# EAGLE board ECE445-Receiver-Schematic (EAGLE 7.5.0)
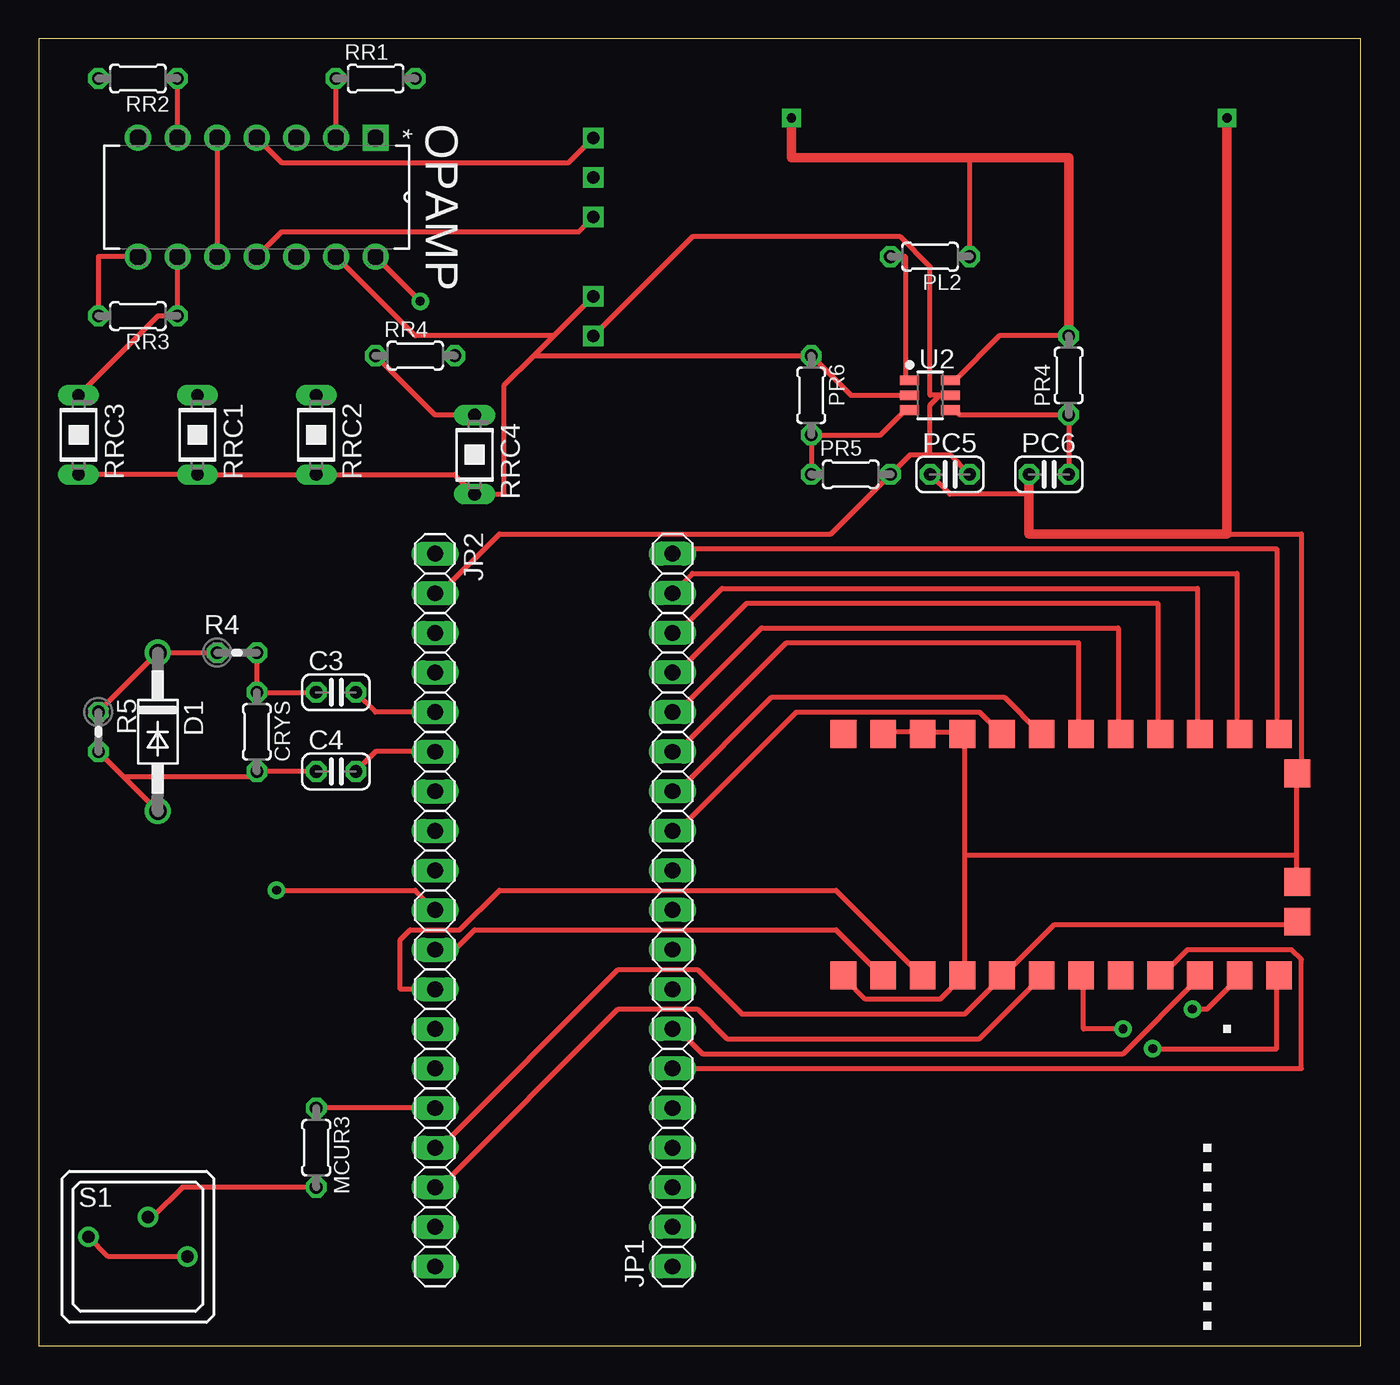
[diagram p0: board, top side]
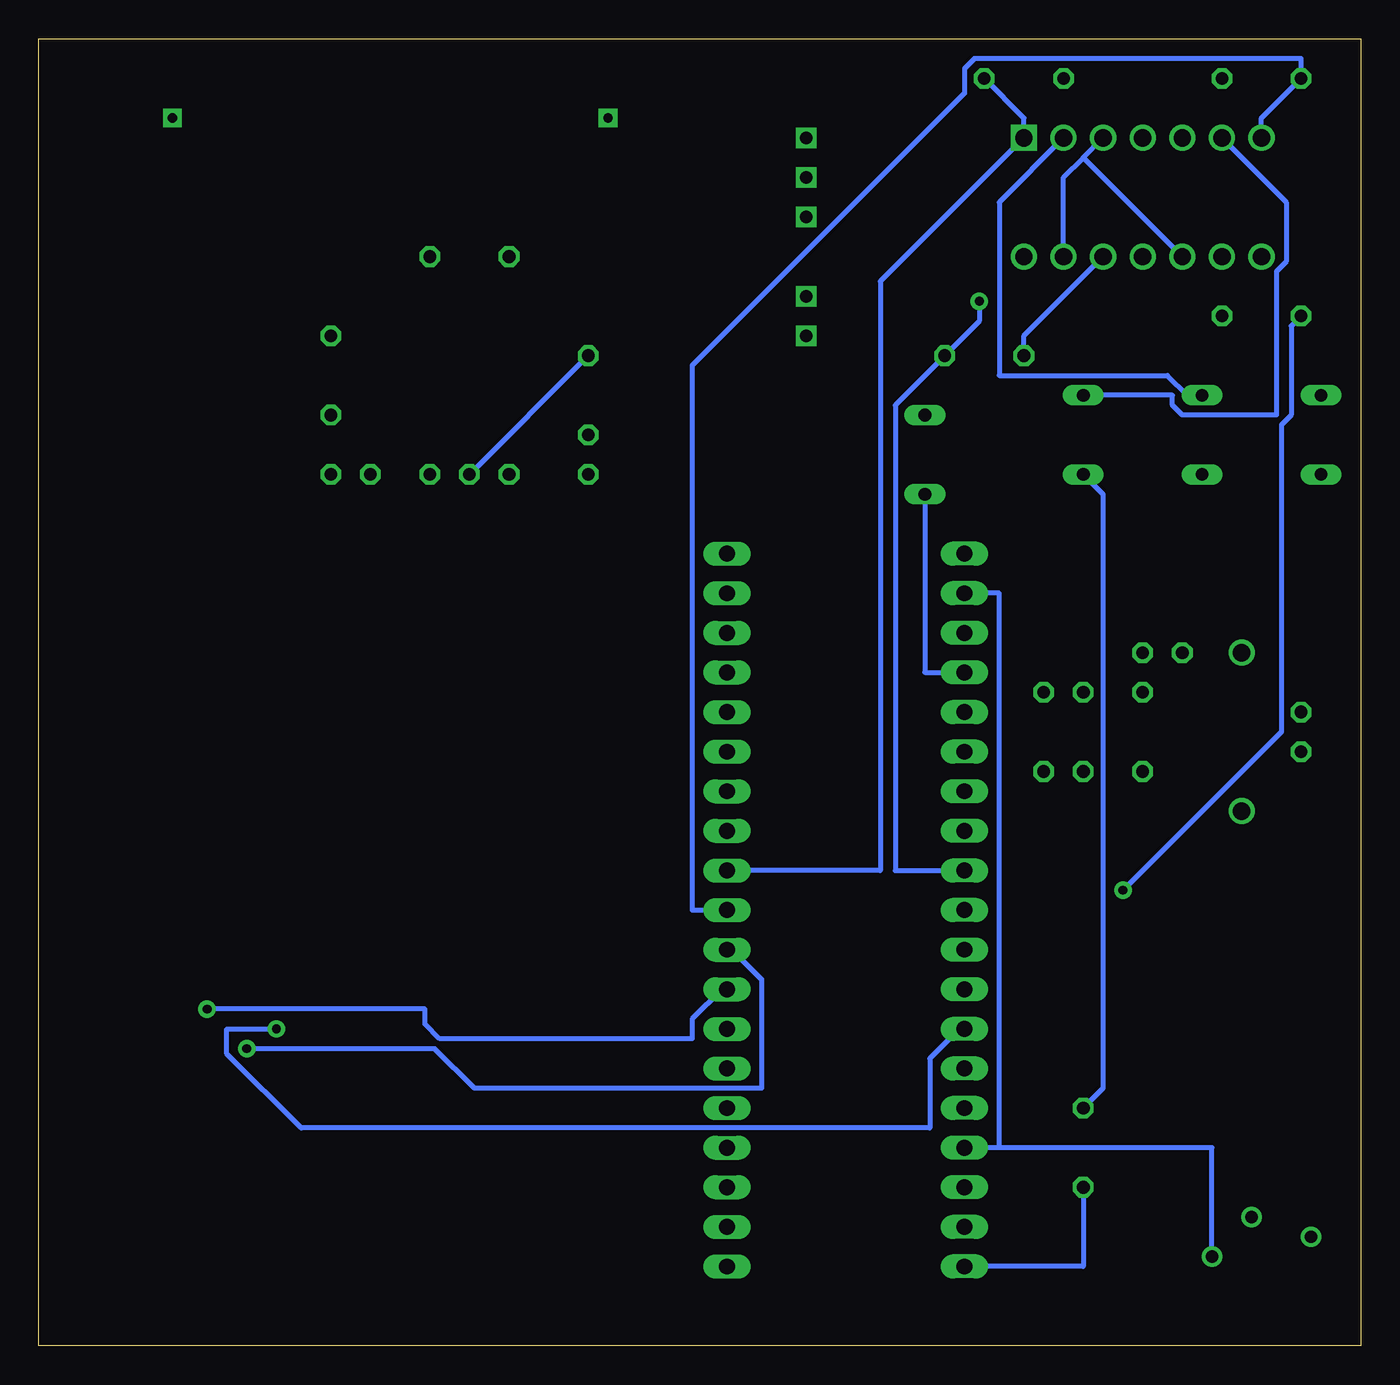
[diagram p1: board, bottom side, seen from below]

Size 84.76 x 83.81 mm. Coordinates in mm from the lower left corner, seen from the top.
Outline: 0,0 84.76,0 84.76,83.81 0,83.81 0,0
Copper layers (1*16): Top 0.035mm / dielectric 1.5mm / Bottom 0.035mm
Design rules "MWSEagleDesignRules2": minimum track width 13mil, minimum drill 22mil, track to track 13mil, track to pad 13mil, pad to pad 13mil, via to via 13mil, smd to smd 8mil, copper to edge 40mil, drill to drill 8mil, minimum pad ring 10mil, minimum via ring 8mil, stop-mask expansion 4mil, vias tented up to drill 0mil, thermal gap 10mil
vRestrict: area 3.8,69.8 to 24.1,77.5; area 54.6,58.4 to 59.7,63.5; area 50.2,22.2 to 83.2,41.3; area 24.1,3.8 to 41.9,53.3

## Footprints (pad centres in the part's own frame; a part is rotated, then mirrored left to right if it is on the bottom)
C025-024X044 = drill 0.813 octagon: 1 -1.27,0; 2 1.27,0
0204/5 = drill 0.813 octagon: 1 -2.54,0; 2 2.54,0
DO41-10 = drill 1.118: A 5.08,0; C -5.08,0
1X19 = drill 1.016 long: 1 -22.86,0; 2 -20.32,0; 3 -17.78,0; 4 -15.24,0; 5 -12.7,0; 6 -10.16,0; 7 -7.62,0; 8 -5.08,0; 9 -2.54,0; 10 0,0; 11 2.54,0; 12 5.08,0; 13 7.62,0; 14 10.16,0; 15 12.7,0; 16 15.24,0; 17 17.78,0; 18 20.32,0; 19 22.86,0
DIP254P762X469-14 = drill 1.118 square: 1 -7.62,15.24 | drill 1.118: 2 -7.62,12.7; 3 -7.62,10.16; 4 -7.62,7.62; 5 -7.62,5.08; 6 -7.62,2.54; 7 -7.62,0; 8 0,0; 9 0,2.54; 10 0,5.08; 11 0,7.62; 12 0,10.16; 13 0,12.7; 14 0,15.24
0204V = drill 0.813 octagon: 1 -1.27,0; 2 1.27,0
BPW32 = drill 0.813 long: A 0,2.54; K 0,-2.54
RDT1034 = drill 0.8: A 3.175,-0.635; A1 -3.175,0.635; B 0.65,1.9
TSOT-23-6 = smd 1.22 x 0.62: 1 -1.31,0.95; 2 -1.31,0; 3 -1.31,-0.95; 4 1.31,-0.95; 5 1.31,0; 6 1.31,0.95
LINX-KH3-TRANSMITTER = smd 1.78 x 1.65: 1 -8,14.44; 2 -8,11.9; 3 -8,9.36; 4 -8,6.82; 5 -8,4.28; 6 -8,1.74; 7 -8,-0.8; 8 -8,-3.34; 9 -8,-5.88; 10 -8,-8.42; 11 -8,-10.96; 12 -8,-13.5; 13 -4.55,-14.67; 14 -2.01,-14.67; 15 4.95,-14.67; 16 7.49,-13.5; 17 7.49,-10.96; 18 7.49,-8.42; 19 7.49,-5.88; 20 7.49,-3.34; 21 7.49,-0.8; 22 7.49,1.74; 23 7.49,4.28; 24 7.49,6.82; 25 7.49,9.36; 26 7.49,11.9; 27 7.49,14.44
NO_CONNECT = smd 0.305 x 0.152: P$1 0,0
PDM1-S3-D12-S = drill 0.8 square: 1 -5.08,0; 2 -2.54,0; 3 2.54,0; 4 5.08,0; 5 7.62,0

## Placement (x,y rotation side)
C3  22p  [C025-024X044]  19.05,41.91 0 top
C4  22p  [C025-024X044]  19.05,36.83 0 top
CRYS  [0204/5]  13.97,39.37 270 top
D1  [DO41-10]  7.62,39.37 270 top
JP1  [1X19]  40.64,27.94 90 top
JP2  [1X19]  25.4,27.94 270 top
MCUR3  130  [0204/5]  17.78,12.7 270 top
OPAMP  MC33179PG  [DIP254P762X469-14]  6.35,69.85 270 top
PC5  4.7 u  [C025-024X044]  58.42,55.88 0 top
PC6  4.7 u  [C025-024X044]  64.77,55.88 0 top
PL2  4.7 u  [0204/5]  57.15,69.85 180 top
PR4  1M  [0204/5]  66.04,62.23 90 top
PR5  1.02M  [0204/5]  52.07,55.88 0 top
PR6  640k  [0204/5]  49.53,60.96 270 top
R4  33k  [0204V]  12.7,44.45 0 top
R5  100M  [0204V]  3.81,39.37 270 top
RR1  500k  [0204/5]  21.59,81.28 0 top
RR2  500k  [0204/5]  6.35,81.28 180 top
RR3  500k  [0204/5]  6.35,66.04 180 top
RR4  500k  [0204/5]  24.13,63.5 0 top
RRC1  BPW32  [BPW32]  10.16,58.42 180 top
RRC2  BPW32  [BPW32]  17.78,58.42 180 top
RRC3  BPW32  [BPW32]  2.54,58.42 180 top
RRC4  BPW32  [BPW32]  27.94,57.15 180 top
S1  RDT1034  [RDT1034]  6.35,6.35 0 top
U2  AAT1217ICA-3.3-T1  [TSOT-23-6]  57.15,60.96 0 top
U$1  LINX-KH3-TRANSMITTER  [LINX-KH3-TRANSMITTER]  66.04,31.75 90 top
U$2  NO_CONNECT  [NO_CONNECT]  76.2,20.32 0 top
U$3  NO_CONNECT  [NO_CONNECT]  74.93,12.7 0 top
U$4  NO_CONNECT  [NO_CONNECT]  74.93,11.43 0 top
U$5  NO_CONNECT  [NO_CONNECT]  74.93,10.16 0 top
U$6  NO_CONNECT  [NO_CONNECT]  74.93,8.89 0 top
U$7  NO_CONNECT  [NO_CONNECT]  74.93,7.62 0 top
U$8  NO_CONNECT  [NO_CONNECT]  74.93,6.35 0 top
U$9  NO_CONNECT  [NO_CONNECT]  74.93,5.08 0 top
U$10  NO_CONNECT  [NO_CONNECT]  74.93,3.81 0 top
U$11  NO_CONNECT  [NO_CONNECT]  74.93,2.54 0 top
U$12  NO_CONNECT  [NO_CONNECT]  74.93,1.27 0 top
U$13  PDM1-S3-D12-S  [PDM1-S3-D12-S]  35.56,69.85 90 top

## Library data of the parts
C3 C4 CRYS MCUR3 PC5 PC6 PL2 PR4-PR6 R4 R5 RR1-RR4 = rcl
D1 = diode
JP1 JP2 = pinhead
OPAMP = ON Semiconductor_By_element14_Batch_1; MPN: MC33179PG; OC_FARNELL: 9666826; OC_NEWARK: 26K4013; PACKAGE: PDIP-14; SUPPLIER: On Semiconductor
RRC1-RRC4 = opto-trans-siemens; OC_FARNELL: unknown; OC_NEWARK: unknown
S1 = switch
U2 = Skyworks
U$1 = Linx-KH3-Transmitter
U$2-U$12 = NO_CONNECT
U$13 = PDM1-S3-D12-S

## Nets
3.3V: JP2.2 JP2.16 PC5.2 PR5.2 S1.A S1.A1 U2.5 U$1.5 U$1.13 U$13.1
+10V: OPAMP.4 U$13.5
-10V: OPAMP.11 U$13.3
GND: JP2.4 JP2.15 MCUR3.1 OPAMP.3 OPAMP.5 OPAMP.10 OPAMP.13 PC5.1 PC6.1 PR6.1 RRC1.A RRC2.A RRC3.A RRC4.A U2.2 U$1.1 U$1.4 U$1.14 U$1.15 U$1.24 U$1.25 U$1.26 U$13.2
MCU-1.0: JP1.12 U$1.23
MCU-1.1: JP1.13 U$1.22
MCU-1.2: JP1.14 U$1.21
MCU-1.3: JP1.15 U$1.20
MCU-1.4: JP1.16 U$1.19
MCU-1.5: JP1.17 U$1.18
MCU-1.6: JP1.18 U$1.17
MCU-1.7: JP1.19 U$1.16
MCU-2.1: JP2.9 OPAMP.14 RR4.2
MCU-2.2: JP2.10 OPAMP.8 RR3.2
MCU-2.3: JP1.10 OPAMP.7 RR2.2
MCU-2.4: JP1.11 OPAMP.1 RR1.2
MCU-3.0: JP2.11 U$1.2
MCU-3.1: JP2.12 U$1.3
MCU-3.2: JP2.13 U$1.7
MCU-3.3: JP2.14
MCU-3.4: JP1.6 U$1.9
MCU-3.5: JP1.7 U$1.10
MCU-3.6: JP1.8 U$1.11
MCU-3.7: JP1.9 U$1.12
MCU-4.0: JP2.17 U$1.6
MSP-XIN: C4.2 JP2.6
MSP-XOUT: C3.2 JP2.5
N$2: PC6.2 PR4.1 U2.4
N$7: JP2.19 MCUR3.2 S1.B
N$8: C3.1 CRYS.1 R4.2
N$9: D1.C R4.1 R5.1
N$10: OPAMP.6 RR2.1 RRC2.K
N$11: C4.1 CRYS.2 D1.A R5.2
N$14: OPAMP.9 RR3.1 RRC3.K
N$30: U$1.27
POWERL2: PL2.2 U2.1
POWERR1: PR5.1 PR6.2 U2.3
RRC1: OPAMP.2 RR1.1 RRC1.K
RRC4: OPAMP.12 RR4.1 RRC4.K
VCC: PL2.1 PR4.2 U2.6

## Tracks (layer width: path | path; a pad name or v marks a point on that pad's centre or on a via)
3.3V
  Top 0.33: 57.78,60.96 U2.5 | 57.78,60.96 57.15,60.33 57.15,57.15 | 57.15,57.15 55.88,57.15 PR5.2 50.8,52.07 29.53,52.07 25.72,48.26 JP2.2 | U$13.1 41.91,71.12 55.24,71.12 57.15,69.22 57.15,60.96 57.78,60.96 | PC5.2 58.42,57.15 57.15,57.15 | U$1.13 80.64,26.99 65.09,26.99 61.91,23.81 U$1.5 61.59,23.5 59.37,21.27 45.09,21.27 42.23,24.13 37.15,24.13 25.72,12.7 JP2.16 | S1.A1 4.45,5.71 S1.A
  Bottom 0.33: 23.18,12.7 9.53,12.7 S1.A | 23.18,12.7 JP2.16 | JP2.2 23.18,48.26 23.18,12.7
+10V
  Top 0.33: U$13.5 33.97,75.88 15.56,75.88 OPAMP.4
-10V
  Top 0.33: U$13.3 34.61,71.44 15.56,71.44 OPAMP.11
GND  (via drill 0.6)
  Top 0.33: U$1.26 54.29,39.37 56.52,39.37 U$1.25 56.83,39.37 59.05,39.37 U$1.24 59.37,39.05 59.37,31.43 | U$1.1 51.75,23.5 53.02,22.23 57.78,22.23 59.05,23.5 U$1.4 59.37,23.81 59.37,31.43 | U2.2 52.07,60.96 PR6.1 31.75,63.5 | 80.64,31.43 80.64,36.51 U$1.15 80.96,36.83 80.96,52.07 76.2,52.07 | 80.64,31.43 80.64,29.84 U$1.14 | PC5.1 58.42,54.61 63.5,54.61 | 80.64,31.43 59.37,31.43 | OPAMP.5 OPAMP.10 | 31.75,63.5 29.84,61.59 29.84,54.61 RRC4.A 26.67,55.88 RRC2.A RRC1.A RRC3.A | 31.75,63.5 33.02,64.77 | 33.02,64.77 U$13.2 | OPAMP.13 24.13,64.77 33.02,64.77 | JP2.15 MCUR3.1
  Top 0.61: PC6.1 63.5,54.61 63.5,52.07 76.2,52.07 v76.2,78.74
  Bottom 0.33: PC5.1 PR6.1 | 17.78,76.2 19.05,74.93 OPAMP.13 | 17.78,76.2 OPAMP.3 | 17.78,76.2 OPAMP.10 | JP2.4 27.94,43.18 RRC4.A | MCUR3.1 16.51,16.51 16.51,54.61 RRC2.A
MCU-1.0
  Top 0.33: JP1.12 40.96,33.02 48.58,40.64 60.33,40.64 61.59,39.37 U$1.23
MCU-1.1
  Top 0.33: JP1.13 40.96,35.56 46.99,41.59 61.91,41.59 64.14,39.37 U$1.22
MCU-1.2
  Top 0.33: JP1.14 40.96,38.1 47.94,45.09 66.67,45.09 66.67,39.37 U$1.21
MCU-1.3
  Top 0.33: JP1.15 40.96,40.64 46.35,46.04 69.22,46.04 69.22,39.37 U$1.20
MCU-1.4
  Top 0.33: JP1.16 40.96,43.18 45.4,47.62 71.75,47.62 71.75,39.37 U$1.19
MCU-1.5
  Top 0.33: JP1.17 40.96,45.72 43.81,48.58 74.3,48.58 74.3,39.37 U$1.18
MCU-1.6
  Top 0.33: JP1.18 41.91,49.53 76.83,49.53 76.83,39.37 U$1.17
MCU-1.7
  Top 0.33: JP1.19 40.96,51.12 79.38,51.12 79.38,39.37 U$1.16
MCU-2.1  (via drill 0.56)
  Top 0.33: OPAMP.14 v24.45,66.99
  Bottom 0.33: v24.45,66.99 24.45,65.72 RR4.2 29.84,60.33 29.84,30.48 JP2.9
MCU-2.2  (via drill 0.56)
  Top 0.33: RR3.2 3.81,69.85 OPAMP.8 | JP2.10 24.13,29.21 v15.24,29.21
  Bottom 0.33: v15.24,29.21 5.08,39.37 5.08,59.05 4.45,59.69 4.45,65.41 RR3.2
MCU-2.3
  Bottom 0.33: OPAMP.7 6.35,78.74 RR2.2 3.81,82.55 24.77,82.55 25.4,81.92 25.4,80.33 42.86,62.87 42.86,27.94 JP1.10
MCU-2.4
  Bottom 0.33: RR1.2 21.59,78.74 OPAMP.1 30.8,68.26 30.8,30.48 JP1.11
MCU-3.0
  Top 0.33: JP2.11 26.67,25.4 27.94,26.67 51.12,26.67 53.98,23.81 U$1.2
MCU-3.1
  Top 0.33: JP2.12 23.18,22.86 23.18,26.04 23.81,26.67 26.99,26.67 29.53,29.21 51.12,29.21 56.52,23.81 U$1.3
MCU-3.2  (via drill 0.56)
  Top 0.33: v69.53,20.32 66.99,20.32 66.99,23.5 U$1.7
  Bottom 0.33: v69.53,20.32 72.71,20.32 72.71,18.73 67.94,13.97 27.62,13.97 27.62,18.41 25.72,20.32 JP2.13
MCU-3.4
  Top 0.33: JP1.6 80.96,17.78 80.96,24.77 80.33,25.4 73.66,25.4 72.07,23.81 U$1.9
MCU-3.5
  Top 0.33: JP1.7 40.96,20.32 42.55,18.73 69.53,18.73 74.3,23.5 U$1.10
MCU-3.6  (via drill 0.56)
  Top 0.33: v73.98,21.59 74.93,21.59 76.83,23.5 U$1.11
  Bottom 0.33: v73.98,21.59 60.01,21.59 60.01,20.64 59.05,19.68 42.86,19.68 42.86,20.95 40.96,22.86 JP1.8
MCU-3.7  (via drill 0.56)
  Top 0.33: v71.44,19.05 79.38,19.05 79.38,23.5 U$1.12
  Bottom 0.33: v71.44,19.05 59.37,19.05 56.83,16.51 38.42,16.51 38.42,23.5 40.32,25.4 JP1.9
MCU-4.0
  Top 0.33: JP2.17 25.72,10.16 37.15,21.59 42.23,21.59 44.13,19.68 60.33,19.68 64.14,23.5 U$1.6
MSP-XIN
  Top 0.33: C4.2 21.59,38.1 JP2.6
MSP-XOUT
  Top 0.33: C3.2 21.59,40.64 JP2.5
N$2
  Top 0.33: U2.4 58.74,60.01 59.05,59.69 PR4.1 PC6.2
N$7
  Top 0.33: MCUR3.2 9.21,10.16 7.3,8.26 S1.B
  Bottom 0.33: JP2.19 17.78,5.08 MCUR3.2
N$8
  Top 0.33: R4.2 CRYS.1 C3.1
N$9
  Top 0.33: R5.1 D1.C R4.1
N$10
  Top 0.33: OPAMP.6 RR2.1
  Bottom 0.33: RRC2.K 12.06,60.96 12.06,60.33 11.43,59.69 5.4,59.69 5.4,68.9 4.76,69.53 4.76,73.34 OPAMP.6
N$11
  Top 0.33: C4.1 CRYS.2 13.65,36.51 5.4,36.51 | D1.A 5.4,36.51 | 5.4,36.51 R5.2
N$14
  Top 0.33: RRC3.K 7.62,66.04 RR3.1 OPAMP.9
POWERL2
  Top 0.33: PL2.2 55.56,69.85 55.56,61.91 U2.1
POWERR1
  Top 0.33: U2.3 55.56,60.01 53.98,58.42 PR6.2 PR5.1
RRC1
  Top 0.33: OPAMP.2 RR1.1
  Bottom 0.33: RRC1.K 11.11,60.96 12.38,62.23 23.18,62.23 23.18,73.34 OPAMP.2
RRC4
  Top 0.33: RR4.1 25.4,59.69 RRC4.K
  Bottom 0.33: OPAMP.12 21.59,64.77 RR4.1
VCC  (via drill 0.6)
  Top 0.33: PR4.2 61.59,64.77 58.74,61.91 U2.6 | 59.69,76.2 PL2.1
  Top 0.61: PR4.2 66.04,76.2 59.69,76.2 48.26,76.2 v48.26,78.74